# Altium PCB dac0808.PcbDoc
Units mm, origin at the board's own origin, x right, y up, seen from the top; angles counter-clockwise.
Board outline 94.61 x 60.75 mm, 2 copper layers (Top Layer, Bottom Layer); 24 components, 39 nets, 166 pads, 4 vias.
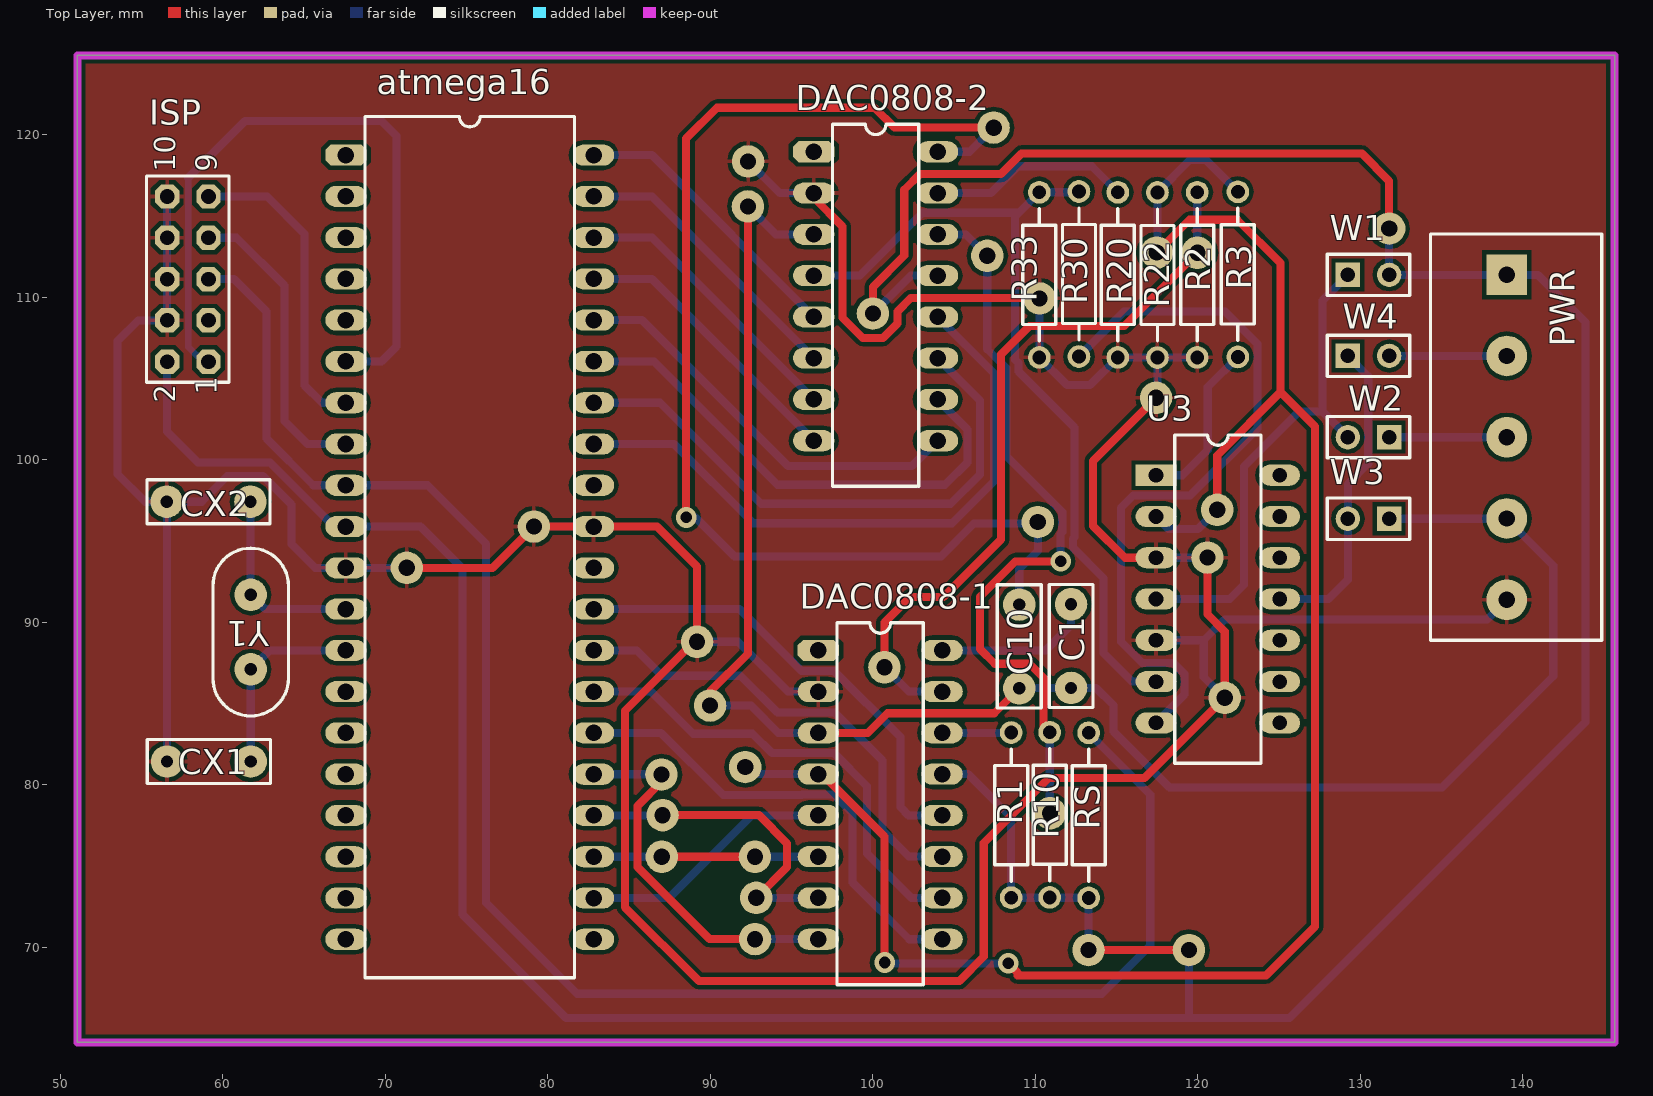
[diagram p0: Top Layer view]
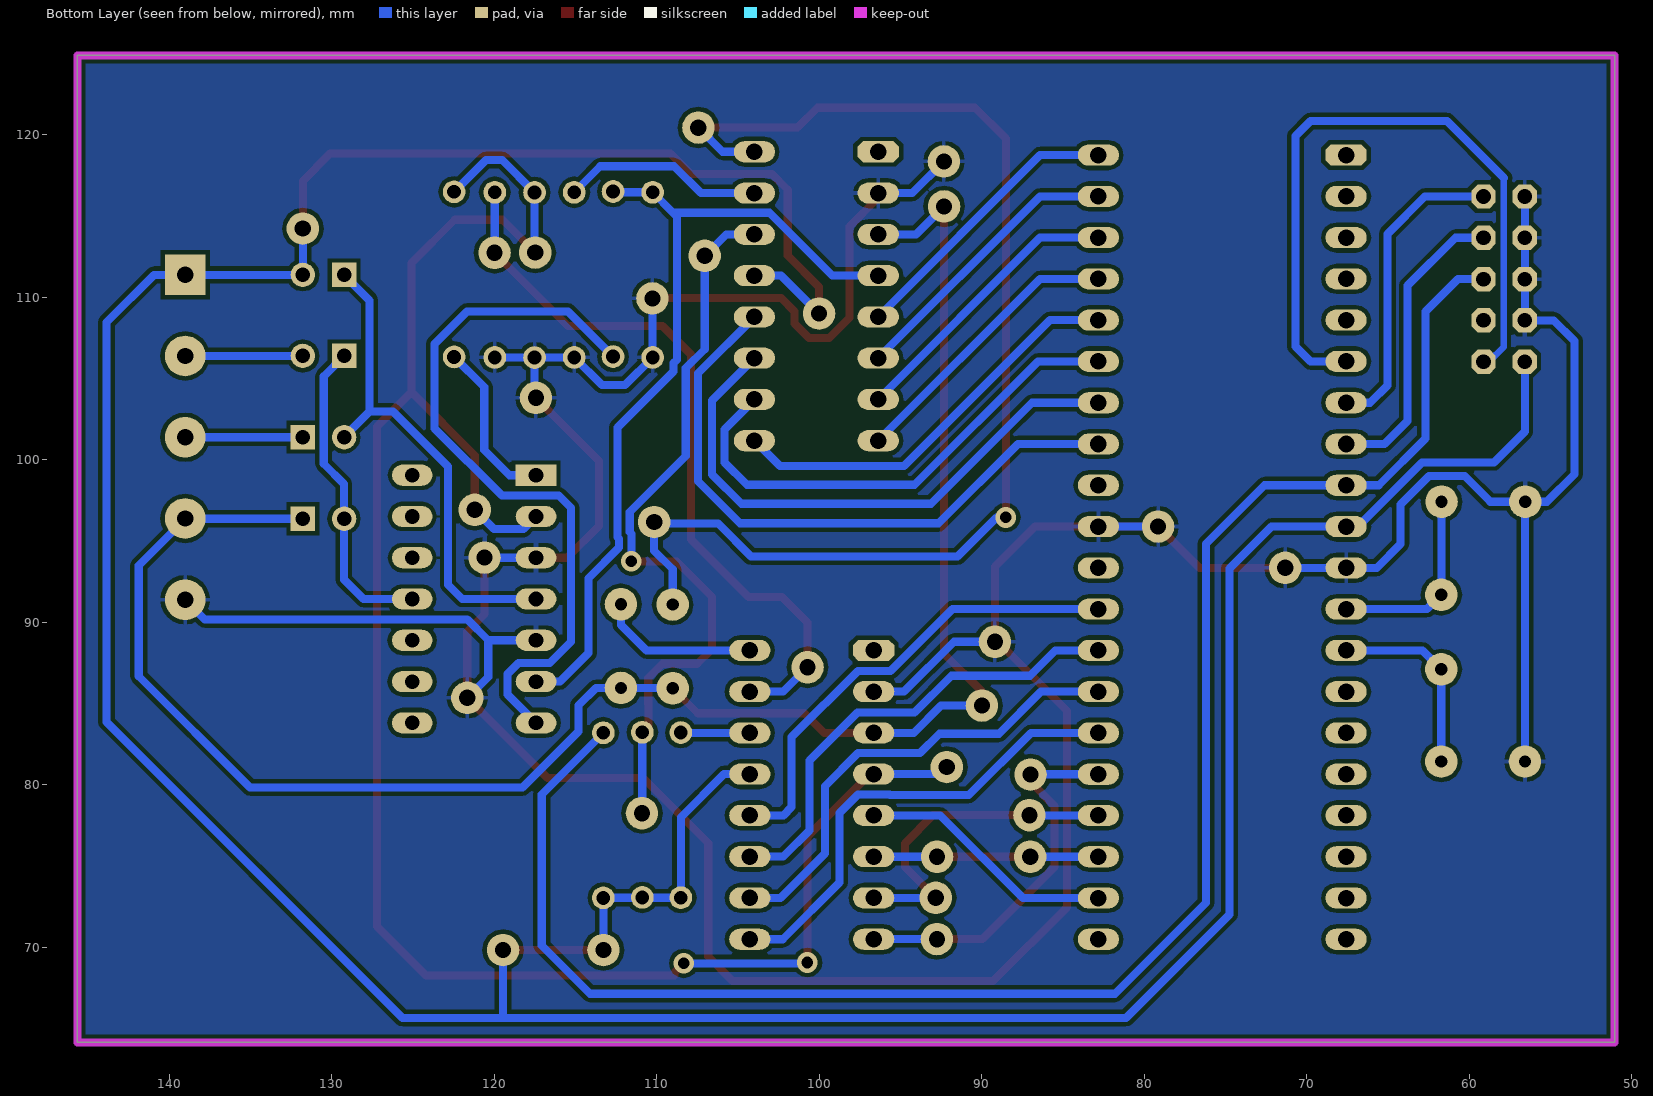
[diagram p1: Bottom Layer view, seen from below]

## Layer stack, top to bottom
Top Solder: solder mask 0.0102, Solder Resist, Dk 3.5
Top Layer: signal copper 0.0356
Dielectric1: dielectric 0.32, FR-4, Dk 4.8
Bottom Layer: signal copper 0.0356
Bottom Solder: solder mask 0.0102, Solder Resist, Dk 3.5

## Board outline
51.04,64.15 51.04,124.9 145.65,124.9 145.65,64.15

## Design rules (kind name [scope] priority, off if disabled: settings)
Clearance [All] p1: gap=0.254
FabricationTestPointUsage TestPointUsage [All] p1: valid=0 allowmultiple=FALSE
FabricationTestpoint Testpoint [All] p1: side=3 testpointundercomponent=TRUE minsize=1.016 maxsize=2.54 preferedsize=1.524 minholesize=0 maxholesize=1.016 preferedholesize=0.813 testpointgrid=0.025 allowsidetop=TRUE allowsidebottom=TRUE usegrid=TRUE gridtolerance=0
PolygonConnect [All] p1: connectstyle=Relief reliefconductorwidth=0.254 reliefentries=4 polygonreliefangle="90 Angle" airgapwidth=0.254
RoutingVias [All] p1: holewidth=0.711 width=1.27 viastyle="Through Hole" minholewidth=0.711 minwidth=1.27 maxholewidth=0.711 maxwidth=1.27
SilkToSolderMaskClearance SilkscreenOverComponentPads [IsPad] p1: minsilkscreentomaskgap=0.254 clearancetoexposedcopper=TRUE
SolderMaskExpansion [All] p1: expansion=0.102
Width [All] p1: maxlimit=1 minlimit=0.5 preferedwidth=1
26 further rules are at their usual default settings.

## Components (designator, comment, footprint, x,y, rotation, side; value= is the part's Value field where it differs from the comment)
atmega16 "atmega16" DIP-40PIN 75.19,94.63 r270 top
C1 "Cap" mkt 112.196,85.97 r90 top
C10 "Cap" mkt 109.01,85.95 r90 top
CX1 "Cap" mkt 56.56,81.44 r0 top
CX2 "Cap" mkt 56.54,97.43 r0 top
DAC0808-1 "DAC0808" DIP-16-1 101.86,82.81 r270 top
DAC0808-2 "DAC0808" DIP-16-1 101.58,113.49 r270 top
ISP "Header 5X2" HDR2X5 59.11,106.05 r90 top
PWR "Header 5" PWR 139.015,111.398 r0 top
R1 "Res2" AXIAL-0.4 108.51,78.14 r270 top
R2 "Res2" AXIAL-0.4 119.96,111.39 r270 top
R3 "Res2" AXIAL-0.4 122.46,111.42 r270 top
R10 "Res2" AXIAL-0.4 110.88,78.16 r90 top
R20 "Res2" AXIAL-0.4 115.07,111.39 r90 top
R22 "Res2" AXIAL-0.4 117.51,111.38 r90 top
R30 "Res2" AXIAL-0.4 112.68,111.44 r90 top
R33 "Res2" AXIAL-0.4 110.24,111.39 r90 top
RS "Res2" AXIAL-0.4 113.28,78.13 r90 top
U3 "LM324AJ" J014 121.23,91.44 r270 top
W1 "Jumper" HDR1X2 129.23,111.39 r0 top
W2 "Jumper" HDR1X2 131.77,101.4 r180 top
W3 "Jumper" HDR1X2 131.77,96.38 r180 top
W4 "Jumper" HDR1X2 129.23,106.4 r0 top
Y1 "XTAL" XTAL 61.71,91.42 r270 top

## Footprints (in the part's own frame and the unit in brackets; to place one, negate y for a bottom-side part, rotate by r counter-clockwise, add the part's x,y. Pads: shape width x height; smd on the part's side, far side on the other; paste and mask are expansions set on the pad)
AXIAL-0.4 [mm] "Resistor; 2 Leads"
  round 1.4 hole 0.85: 1(-5.08,0) 2(5.08,0)
  silkscreen extent -4.06,-1.02 4.06,1.02
DIP-16-1 [mil]
  oct 51.18x100 hole 40: 1(-215.5,-205.5)
  oval 51.18x100 hole 40: 2(-115.5,-205.5) 3(-15.5,-205.5) 4(84.5,-205.5) 5(184.5,-205.5) 6(284.5,-205.5) 7(384.5,-205.5) 8(484.5,-205.5) 9(484.5,94.5) 10(384.5,94.5) 11(284.5,94.5) 12(184.5,94.5) 13(84.5,94.5) 14(-15.5,94.5) 15(-115.5,94.5) 16(-215.5,94.5)
  silkscreen extent -282,-160 595,49
DIP-40PIN [mm]
  oct 1.3x2.54 hole 1.016: 1(-24.13,-7.62)
  oval 1.3x2.54 hole 1.016: 2(-21.59,-7.62) 3(-19.05,-7.62) 4(-16.51,-7.62) 5(-13.97,-7.62) 6(-11.43,-7.62) 7(-8.89,-7.62) 8(-6.35,-7.62) 9(-3.81,-7.62) 10(-1.27,-7.62) 11(1.27,-7.62) 12(3.81,-7.62) 13(6.35,-7.62) 14(8.89,-7.62) 15(11.43,-7.62) 16(13.97,-7.62) 17(16.51,-7.62) 18(19.05,-7.62) 19(21.59,-7.62) 20(24.13,-7.62) 21(24.13,7.62) 22(21.59,7.62) 23(19.05,7.62) 24(16.51,7.62) 25(13.97,7.62) 26(11.43,7.62) 27(8.89,7.62) 28(6.35,7.62) 29(3.81,7.62) 30(1.27,7.62) 31(-1.27,7.62) 32(-3.81,7.62) 33(-6.35,7.62) 34(-8.89,7.62) 35(-11.43,7.62) 36(-13.97,7.62) 37(-16.51,7.62) 38(-19.05,7.62) 39(-21.59,7.62) 40(-24.13,7.62)
  silkscreen extent -26.5,-6.45 26.5,6.45
HDR1X2 [mm] "Connector; Header; 2 Position"
  rect 1.5x1.5 hole 0.9: 1(0,0)
  round 1.5 hole 0.9: 2(2.54,0)
  silkscreen extent -1.27,-1.27 3.81,1.27
HDR2X5 [mm] "Connector; Header; 5x2 Position"
  oct 1.5x1.5 hole 0.9: 1(0,0) 2(0,2.54) 3(2.54,0) 4(2.54,2.54) 5(5.08,0) 6(5.08,2.54) 7(7.62,0) 8(7.62,2.54) 9(10.16,0) 10(10.16,2.54)
  silkscreen extent -1.27,-1.27 11.43,3.81
J014 [mm] "DIP; 14 Leads; Row Spacing 7.62 mm; Pitch 2.54 mm"
  rect 1.3x2.5 hole 0.9: 1(-7.62,-3.81)
  oval 1.3x2.5 hole 0.9: 2(-5.08,-3.81) 3(-2.54,-3.81) 4(0,-3.81) 5(2.54,-3.81) 6(5.08,-3.81) 7(7.62,-3.81) 8(7.62,3.81) 9(5.08,3.81) 10(2.54,3.81) 11(0,3.81) 12(-2.54,3.81) 13(-5.08,3.81) 14(-7.62,3.81)
  silkscreen extent -10.1,-2.65 10.1,2.65
mkt [mm]
  round 2 hole 0.75: 1(0,0) 2(5.15,0)
  silkscreen extent -1.21,-1.35 6.36,1.35
PWR [mm]
  rect 2.5x2.5 hole 1: 1(0,0)
  round 2.5 hole 1: 2(0,-5) 3(0,-10) 4(0,-15) 5(0,-20)
  silkscreen extent -4.7,-22.5 5.84,2.5
XTAL [mm]
  round 2 hole 0.75: 1(-0.28,0) 2(4.306,0)
  silkscreen extent -3.15,-2.32 7.17,2.32

## Part data
C1 C10 CX1 CX2: "Capacitor"
ISP: "Header, 5-Pin, Dual row"
PWR: "Header, 5-Pin"
R1 R2 R3 R10 R20 R22 R30 R33 RS: "Resistor"
U3: "Quadruple Operational Amplifier"
W1 W2 W3 W4: "Jumper Wire"
Y1: "Crystal Oscillator"

## Free pads (board coordinates)
  round 2 hole 1: 0(86.99,80.64) 0(92.14,81.1) 1(87.06,78.14) 1(89.98,84.88) 2(71.32,93.36) 2(87.01,75.58) 3(79.14,95.9) 3(92.74,75.58) 4(89.18,88.81) 4(92.82,73.05) 5(92.75,70.51) 5(121.65,85.36) 6(113.27,69.84) 7(119.45,69.84) 8(131.77,114.24) 9(100,109.01) 10(92.31,115.6) 11(110.26,109.94) 12(92.32,118.37) 13(121.19,96.93) 14(120.59,93.99) 15(117.43,103.82) 16(100.71,87.24) 17(119.97,112.75) 18(117.47,112.76) 19(110.9,78.26) 20(110.15,96.18) 21(107.43,120.45) 22(107.04,112.56)

## Via types
v1: diameter 1.27, hole 0.711, Top Layer to Bottom Layer, 4 vias

## Nets (pads, with @x,y where several pads share a name; then routed paths per layer and width w, separated by ;. In a path a pad name is that pad's centre, name@x,y a point inside that pad or via, vN(x,y) a via of type N, cw(c..) or ccw(c..) an arc to the next point about the centre after c; other vN are vias at no path point)
+5: atmega16.10 DAC0808-1.13 DAC0808-2.13 ISP.2 pad.6 pad.7 pad.8 pad.9 PWR.1 R1.2 R10.1 RS.1 W1.2 | length 243.7
  Top Layer w0.5: pad.9 100,110.65 101.93,112.58 101.93,116.625 102.905,117.6 107.89,117.6 109.14,118.85 130.09,118.85 131.77,117.17 pad.8 ; pad.6 pad.7
  Bottom Layer w0.5: ISP.2 56.57,101.74 58.47,99.84 62.9,99.84 66.84,95.9 atmega16.10 72.16,95.9 74.75,93.31 74.75,72.02 81.12,65.65 119.48,65.65 ; pad.9 102.334,111.344 DAC0808-2.13 ; DAC0808-1.13 105.856,80.664 108.51,78.01 R1.2 RS.1@113.27,73.06 ; pad.6 113.27,73.04 RS.1 ; pad.7 119.45,65.68 119.48,65.65 ; pad.8 W1.2 140.93,111.39 143.85,108.47 143.85,83.87 125.63,65.65 119.48,65.65
+12: PWR.3 W2.1 | length 7.2
  Bottom Layer w0.5: W2.1 131.772,101.398 PWR.3
-5: PWR.2 W4.2 | length 7.2
  Bottom Layer w0.5: W4.2 PWR.2@139.013,106.4
-12: C1.1 C10.1 DAC0808-1.3 DAC0808-2.3 pad.1@89.98,84.88 pad.10 PWR.4 W3.1 | length 114.6
  Top Layer w0.5: pad.1@89.98,84.88 89.98,85.74 92.31,88.07 pad.10 ; DAC0808-1.3 99.684,83.204 100.89,84.41 107.47,84.41 C10.1
  Bottom Layer w0.5: pad.1@89.98,84.88 92.5,84.88 94.176,83.204 DAC0808-1.3 ; pad.10 94.026,113.884 DAC0808-2.3 ; C10.1@109.03,85.97 C1.1 113.74,85.97 114.81,84.9 114.81,83.28 118.25,79.84 135.02,79.84 141.87,86.69 141.87,93.507 138.997,96.38 W3.1
GND: atmega16.11 atmega16.31 CX1.1 CX2.1 DAC0808-1.2 DAC0808-2.2 ISP.4 ISP.6 ISP.8 ISP.10 pad.2@71.32,93.36 pad.3@79.14,95.9 pad.4@89.18,88.81 pad.5@121.65,85.36 pad.11 pad.12 pad.14 pad.15 PWR.5 R2.2 R20.1 R22.1 R33.1 U3.3 U3.5 | length 261.1
  Top Layer w0.5: pad.2@71.32,93.36 76.6,93.36 79.14,95.9 atmega16.31 86.72,95.9 89.18,93.44 pad.4@89.18,88.81 ; pad.4@89,88.81 84.752,84.562 84.752,72.468 89.289,67.931 105.321,67.931 106.82,69.43 106.82,76.43 110.82,80.43 116.72,80.43 121.65,85.36 121.65,89.44 120.59,90.5 pad.14 ; DAC0808-2.2 96.36,116.136 98.134,114.362 98.134,108.749 99.377,107.506 100.623,107.506 101.504,108.387 101.504,109.134 102.328,109.958 110.242,109.958 pad.11 ; U3.3 115.51,93.98 113.55,95.94 113.55,99.94 pad.15
  Bottom Layer w0.5: CX1.1 56.56,97.41 CX2.1 ; ISP.10 ISP.8 ISP.6 ISP.4 54.79,108.59 53.52,107.32 53.52,99.12 55.21,97.43 CX2.1 ; pad.2@71.32,93.36 atmega16.11 65.68,93.36 64.21,94.83 64.21,97.25 62.46,99 60.27,99 58.7,97.43 CX2.1 ; pad.3@79.14,95.9 atmega16.31 ; pad.4@89.18,88.81 91.71,88.81 94.776,85.744 DAC0808-1.2 ; pad.12 94.266,116.424 DAC0808-2.2 ; R33.1 111.94,104.61 113.37,104.61 R20.1 R2.2 ; R33.1@110.26,106.33 pad.11 ; U3.5 120.36,88.9 ; U3.3 pad.14@120.58,93.98 ; pad.15@117.51,103.9 R22.1 ; pad.5@121.65,85.36 120.36,86.65 120.36,88.9 ; PWR.5 137.807,90.19 121.65,90.19 120.36,88.9
MISO: atmega16.7 ISP.9 | length 19.2
  Bottom Layer w0.5: ISP.9 62.73,116.21 65.03,113.91 65.03,104.59 66.1,103.52 atmega16.7
MOSI: atmega16.6 ISP.1 | length 43.1
  Bottom Layer w0.4: 57.856,117.346 57.856,106.964 58.77,106.05 ISP.1
  Bottom Layer w0.5: 57.856,117.346 61.36,120.85 69.77,120.85 70.68,119.94 70.68,106.98 69.76,106.06 atmega16.6
Netatmega16_12: atmega16.12 CX2.2 Y1.1 | length 12
  Bottom Layer w0.5: CX2.2 61.69,91.72 Y1.1 62.59,90.82 atmega16.12
Netatmega16_13: atmega16.13 CX1.2 Y1.2 | length 12
  Bottom Layer w0.5: CX1.2 Y1.2 62.876,88.28 atmega16.13
Netatmega16_22: atmega16.22 DAC0808-1.5 | length 15.9
  Bottom Layer w0.5: atmega16.22 87.46,73.04 92.544,78.124 DAC0808-1.5
Netatmega16_23: atmega16.23 DAC0808-1.6 pad.2@87.01,75.58 pad.3@92.74,75.58 | length 13.8
  Top Layer w0.5: pad.2@87.01,75.58 pad.3@92.74,75.58
  Bottom Layer w0.5: atmega16.23 pad.2@87.01,75.58 ; pad.3@92.74,75.58 DAC0808-1.6@96.637,75.58
Netatmega16_24: atmega16.24 DAC0808-1.7 pad.1@87.06,78.14 pad.4@92.82,73.05 | length 20.6
  Top Layer w0.5: pad.1@87.06,78.14 92.98,78.14 94.72,76.4 94.72,74.95 pad.4@92.82,73.05
  Bottom Layer w0.5: atmega16.24 pad.1@87.04,78.12 ; pad.4@92.82,73.05 DAC0808-1.7@96.634,73.05
Netatmega16_25: atmega16.25 DAC0808-1.8 pad.0@86.99,80.64 pad.5@92.75,70.51 | length 23.4
  Top Layer w0.5: pad.0@86.99,80.64 86.99,80.197 85.506,78.713 85.506,74.957 89.953,70.51 pad.5@92.75,70.51
  Bottom Layer w0.5: atmega16.25 pad.0@86.97,80.66 ; pad.5@92.75,70.51 DAC0808-1.8@96.634,70.51
Netatmega16_26: atmega16.26 DAC0808-1.9 | length 29.2
  Bottom Layer w0.5: atmega16.26 86.97,83.2 90.79,79.38 95.632,79.38 95.652,79.4 97.616,79.4 98.74,78.276 98.74,74 102.236,70.504 DAC0808-1.9
Netatmega16_27: atmega16.27 DAC0808-1.10 | length 29.1
  Bottom Layer w0.5: atmega16.27 86.34,85.74 88.93,83.15 92.59,83.15 93.78,81.96 97.596,81.96 99.64,79.916 99.64,75.77 102.366,73.044 DAC0808-1.10
Netatmega16_28: atmega16.28 DAC0808-1.11 | length 29.2
  Bottom Layer w0.5: atmega16.28 85.47,88.28 87.03,86.72 91.86,86.72 94.12,84.46 97.636,84.46 100.59,81.506 100.59,77.2 102.206,75.584 DAC0808-1.11
Netatmega16_29: atmega16.29 DAC0808-1.12 | length 29.2
  Bottom Layer w0.5: atmega16.29 91.796,90.82 95.596,87.02 97.616,87.02 101.69,82.946 101.69,78.63 102.196,78.124 DAC0808-1.12
Netatmega16_33: atmega16.33 DAC0808-2.12 | length 39.3
  Bottom Layer w0.5: atmega16.33 87.77,100.98 92.65,96.1 104.86,96.1 107.45,98.69 107.45,105.334 DAC0808-2.12
Netatmega16_34: atmega16.34 DAC0808-2.11 | length 35.3
  Bottom Layer w0.5: atmega16.34 86.89,103.52 93.11,97.3 104.77,97.3 106.58,99.11 106.58,103.664 DAC0808-2.11
Netatmega16_35: atmega16.35 DAC0808-2.10 | length 31.4
  Bottom Layer w0.5: atmega16.35 86.54,106.06 94.13,98.47 104.44,98.47 105.82,99.85 105.82,101.884 DAC0808-2.10
Netatmega16_36: atmega16.36 DAC0808-2.9 | length 25.5
  Bottom Layer w0.5: atmega16.36 85.8,108.6 94.78,99.62 102.417,99.62 DAC0808-2.9
Netatmega16_37: atmega16.37 DAC0808-2.8 | length 17.7
  Bottom Layer w0.5: atmega16.37 86.404,111.14 DAC0808-2.8
Netatmega16_38: atmega16.38 DAC0808-2.7 | length 17.7
  Bottom Layer w0.5: atmega16.38 86.404,113.68 DAC0808-2.7
Netatmega16_39: atmega16.39 DAC0808-2.6 | length 17.7
  Bottom Layer w0.5: atmega16.39 86.404,116.22 DAC0808-2.6
Netatmega16_40: atmega16.40 DAC0808-2.5 | length 17.7
  Bottom Layer w0.5: atmega16.40 86.404,118.76 DAC0808-2.5
NetC1_2: C1.2 DAC0808-1.16 | length 9.9
  Bottom Layer w0.5: DAC0808-1.16 110.634,88.284 112.196,89.846 C1.2
NetC10_2: C10.2 DAC0808-2.16 pad.20 pad.21 | length 76.6
  Top Layer w0.5: v1(88.51,96.46) 88.51,119.78 90.4,121.67 100.11,121.67 101.33,120.45 pad.21
  Bottom Layer w0.5: v1(88.51,96.46) 89.08,96.46 91.49,94.05 104.18,94.05 106.21,96.08 pad.20@110.08,96.08 ; DAC0808-2.16 105.944,118.964 pad.21 ; C10.2 109.01,93.27 110.15,94.41 pad.20
NetDAC0808-1_4: DAC0808-1.4 pad.0@92.14,81.1 pad.13 pad.18 R3.1 R22.2 U3.2 | length 121.1
  Top Layer w0.5: DAC0808-1.4@96.84,80.71 100.72,76.83 v1(100.72,69.07) ; v1(108.33,69.02) 108.89,68.46 108.89,68.27 124.2,68.27 127.21,71.28 127.21,102.05 125.09,104.17 ; pad.18 119.49,114.78 122.42,114.78 125.09,112.11 125.09,104.17 ; pad.13 121.19,100.27 125.09,104.17
  Bottom Layer w0.5: pad.0@92.14,81.1 92.576,80.664 DAC0808-1.4 ; v1(100.72,69.07) 100.77,69.02 v1(108.33,69.02) ; U3.2 118.2,95.74 120,95.74 pad.13 ; pad.18@117.51,112.8 R22.2 119.5,118.45 120.51,118.45 R3.1
NetDAC0808-1_14: DAC0808-1.14 R1.1 | length 4.2
  Bottom Layer w0.5: DAC0808-1.14 R1.1@108.494,83.204
NetDAC0808-1_15: DAC0808-1.15 pad.16 pad.17 R2.1 | length 46
  Top Layer w0.5: pad.16 100.71,89.99 102.28,91.56 104.35,91.56 107.89,95.1 107.89,106.5 109.64,108.25 115.47,108.25 pad.17
  Bottom Layer w0.5: pad.16 102.206,85.744 DAC0808-1.15 ; pad.17@119.96,112.76 R2.1
NetDAC0808-2_4: DAC0808-2.4 R30.2 R33.2 U3.6 | length 51.9
  Bottom Layer w0.5: DAC0808-2.4 99.188,111.344 103.055,115.21 108.98,115.21 ; R30.2@112.63,116.47 R33.2 108.98,115.21 ; U3.6 115.95,86.36 114.2,88.11 114.2,92.721 112.31,94.611 112.31,95.147 112.408,95.245 112.408,102.002 108.958,105.452 108.958,105.959 108.75,106.167 108.75,114.98 108.98,115.21
NetDAC0808-2_14: DAC0808-2.14 pad.19 pad.22 R10.2 | length 46.5
  Top Layer w0.5: R10.2@110.51,83.12 110.51,84.996 110.514,85 110.514,86.573 109.633,87.454 107.496,87.454 106.58,88.37 106.58,91.58 108.76,93.76 v1(111.55,93.76)
  Bottom Layer w0.5: DAC0808-2.14 105.716,113.884 pad.22 107.04,106.81 108.204,105.646 108.204,100.253 111.654,96.803 111.654,95.557 111.55,95.453 v1(111.55,93.76) ; pad.19@110.88,78.28 R10.2
NetDAC0808-2_15: DAC0808-2.15 R20.2 | length 12.4
  Bottom Layer w0.5: DAC0808-2.15 107.274,116.424 108.92,118.07 113.47,118.07 R20.2
NetR3_2: R3.2 U3.1 | length 10.3
  Bottom Layer w0.5: U3.1 119.06,99.06 120.61,100.61 120.61,104.49 R3.2
NetR30_1: R30.1 U3.7 | length 45.3
  Bottom Layer w0.5: R30.1 115.45,109.13 121.68,109.13 123.664,107.146 123.664,101.944 119.52,97.8 116.02,97.8 115.28,97.06 115.28,88.808 116.574,87.514 118.498,87.514 119.174,86.838 119.174,85.574 U3.7
RESET: atmega16.9 ISP.5 RS.2 | length 109.6
  Bottom Layer w0.5: ISP.5 60.68,111.13 62.68,109.13 62.68,101.32 65.56,98.44 atmega16.9 72.59,98.44 76.19,94.84 76.19,72.75 81.79,67.15 114.1,67.15 117.07,70.12 117.07,79.42 RS.2
SCK: atmega16.8 ISP.7 | length 18.6
  Bottom Layer w0.5: ISP.7 60.84,113.67 63.78,110.73 63.78,102.4 65.2,100.98 atmega16.8
V+: U3.4 W1.1 W2.2 | length 30.6
  Bottom Layer w0.5: U3.4 121.96,91.44 122.84,92.32 122.84,99.59 126.22,102.97 127.66,102.97 ; W2.2 127.66,102.97 ; W1.1 127.66,109.82 127.66,102.97
V-: U3.11 W3.2 W4.1 | length 19.5
  Bottom Layer w0.5: U3.11 128.04,91.44 129.23,92.63 W3.2 129.23,98.51 130.484,99.764 130.484,105.146 W4.1
pads on no net: atmega16.1 atmega16.2 atmega16.3 atmega16.4 atmega16.5 atmega16.14 atmega16.15 atmega16.16 atmega16.17 atmega16.18 atmega16.19 atmega16.20 atmega16.21 atmega16.30 atmega16.32 DAC0808-1.1 DAC0808-2.1 ISP.3 U3.8 U3.9 U3.10 U3.12 U3.13 U3.14

## Polygon pours and split planes (outlines as drawn)
GND on Top Layer "GND" (solid, remove dead copper, pour order 2): 51.45,124.5 51.45,64.55 51.5,64.6 145.1,64.6 145.1,124.5 51.45,124.5
GND on Bottom Layer "GND" (solid, remove dead copper, pour order 2): 51.47,124.496 51.47,64.546 51.52,64.596 145.12,64.596 145.12,124.496 51.47,124.496

## Keep-outs
Keep-Out Layer:
  the board outline again, w0.5

## Text inside footprints (layer, text, board x,y; h text height)
ISP: Top Overlay "10" at 57.078,117.734 h1.27 r90; Top Overlay "9" at 59.618,117.734 h1.27 r90; Top Overlay "1" at 59.618,104.018 h1.27 r90; Top Overlay "2" at 57.078,103.51 h1.27 r90